# EAGLE board numpad.old (EAGLE 9.6.1)

Size 95 x 99 mm. Coordinates in mm from the lower left corner, seen from the top.
Outline: 0,0 95,0 95,99 0,99 0,0
Copper layers (1*16): Top 0.035mm / dielectric 1.5mm / Bottom 0.035mm
Design rules "default": minimum track width 6mil, minimum drill 0.35mm, track to track 6mil, track to pad 6mil, pad to pad 6mil, via to via 6mil, smd to smd 6mil, copper to edge 40mil, drill to drill 6mil, minimum pad ring 10mil, minimum via ring 8mil, stop-mask expansion 4mil, vias tented up to drill 0mil, thermal gap 10mil

## Footprints (pad centres in the part's own frame; a part is rotated, then mirrored left to right if it is on the bottom)
MX-1U = drill 1.3 pad 2.54: MX1 -3.81,2.54; MX2 2.54,5.08 | hole 4: 0,0 | hole 1.7: -5.08,0; 5.08,0
DIODE_HAND = smd 1.397 x 1.397: A1 -1.651,0; C1 1.651,0 | drill 1 pad 1.9: A2 -3.5,0 | smd 1.397 x 1.397 bottom: A3 -1.651,0; C3 1.651,0 | drill 1 pad 1.9 square: C2 3.5,0
SWITCH-SMD-SCHURTER-1241.1612.11 = smd 3 x 2: 1A -7,-3.75; 1B 7,-3.75; 2A -7,3.75; 2B 7,3.75
PROMICRO = drill 1 pad 2: 0 -7.62,11.43; 1 -7.62,13.97; 2 -7.62,3.81; 3 -7.62,1.27; 4 -7.62,-1.27; 5 -7.62,-3.81; 6 -7.62,-6.35; 7 -7.62,-8.89; 8 -7.62,-11.43; 9 -7.62,-13.97; 10 7.5,-13.97; 14 7.5,-8.89; 15 7.5,-6.35; 16 7.5,-11.43; 18 7.5,-3.81; 19 7.5,-1.27; 20 7.5,1.27; 21 7.5,3.81; GND@3 -7.62,8.89; GND@4 -7.62,6.35; GND@23 7.5,11.43; RAW 7.5,13.97; RST 7.5,8.89; VCC 7.5,6.35 | hole 2: -3.82,9.87; -4.318,-10.67; 4.318,-10.67
MX-2U-FLIPPED = drill 1.3 pad 2.54: MX1 -3.81,2.54; MX2 2.54,5.08 | hole 4: 0,0; -11.9,8.24; 11.9,8.24 | hole 1.7: -5.08,0; 5.08,0 | hole 3.05: -11.9,-7; 11.9,-7
MX-2U-ROTATED = drill 1.3 pad 2.54: MX1 -3.81,2.54; MX2 2.54,5.08 | hole 4: 0,0; -8.24,-11.9; -8.24,11.9 | hole 1.7: -5.08,0; 5.08,0 | hole 3.05: 7,-11.9; 7,11.9

## Placement (x,y rotation side)
BOTTOM1  KEYSWITCH-PLAIN-MX-1U  [MX-1U]  65.7,11.64 0 top
D1  [DIODE_HAND]  28,79 0 top
D2  [DIODE_HAND]  47,79 0 top
D3  [DIODE_HAND]  66,79 0 top
D4  [DIODE_HAND]  85,79 0 top
D5  [DIODE_HAND]  28,60 0 top
D6  [DIODE_HAND]  47,60 0 top
D7  [DIODE_HAND]  66,60 0 top
D8  [DIODE_HAND]  85,40 0 top
D9  [DIODE_HAND]  66,40 0 top
D10  [DIODE_HAND]  47,40 0 top
D11  [DIODE_HAND]  28,40 0 top
D12  [DIODE_HAND]  20,19 270 top
D13  [DIODE_HAND]  41,21 0 top
D14  [DIODE_HAND]  66,21 0 top
D15  [DIODE_HAND]  85,2 0 top
D16  [DIODE_HAND]  65,2 0 top
D17  [DIODE_HAND]  41,2 0 top
SW1  SWITCH-SMD-SCHURTER-1241.1612.11  [SWITCH-SMD-SCHURTER-1241.1612.11]  10,59 0 top
TOPLEFT  KEYSWITCH-PLAIN-MX-1U  [MX-1U]  27.63,87.8 0 top
TOPRIGHT  KEYSWITCH-PLAIN-MX-1U  [MX-1U]  84.78,87.84 0 top
U1  PROMICRO  [PROMICRO]  10.24,83.54 0 top
U$1  KEYSWITCH-PLAIN-MX-2U-FLIPPED  [MX-2U-FLIPPED]  37.17,11.64 0 top
U$2  KEYSWITCH-PLAIN-MX-2U-ROTATED  [MX-2U-ROTATED]  84.82,59.25 0 top
U$3  KEYSWITCH-PLAIN-MX-2U-ROTATED  [MX-2U-ROTATED]  84.78,21.16 0 top
U$20  KEYSWITCH-PLAIN-MX-1U  [MX-1U]  46.69,87.81 0 top
U$21  KEYSWITCH-PLAIN-MX-1U  [MX-1U]  65.74,87.81 0 top
U$23  KEYSWITCH-PLAIN-MX-1U  [MX-1U]  27.62,68.78 0 top
U$24  KEYSWITCH-PLAIN-MX-1U  [MX-1U]  46.69,68.76 0 top
U$25  KEYSWITCH-PLAIN-MX-1U  [MX-1U]  65.71,68.76 0 top
U$26  KEYSWITCH-PLAIN-MX-1U  [MX-1U]  65.7,49.76 0 top
U$27  KEYSWITCH-PLAIN-MX-1U  [MX-1U]  46.66,49.74 0 top
U$28  KEYSWITCH-PLAIN-MX-1U  [MX-1U]  27.62,49.7 0 top
U$29  KEYSWITCH-PLAIN-MX-1U  [MX-1U]  27.62,30.68 0 top
U$30  KEYSWITCH-PLAIN-MX-1U  [MX-1U]  46.66,30.66 0 top
U$31  KEYSWITCH-PLAIN-MX-1U  [MX-1U]  65.7,30.7 0 top

## Library data of the parts
BOTTOM1 TOPLEFT TOPRIGHT U$1-U$3 U$20 U$21 U$23-U$31 = Keyboard
D1-D17 = Components
SW1 = Hardware
U1 = MCU

## Nets
GND: SW1.2A SW1.2B U1.GND@3 U1.GND@4 U1.GND@23
N$1: SW1.1A SW1.1B U1.RST
N$2: D1.A1 D1.A2 D1.A3 TOPLEFT.MX1
N$3: D2.A1 D2.A2 D2.A3 U$20.MX1
N$4: D3.A1 D3.A2 D3.A3 U$21.MX1
N$5: D4.A1 D4.A2 D4.A3 TOPRIGHT.MX1
N$6: D1.C1 D1.C2 D1.C3 D2.C1 D2.C2 D2.C3 D3.C1 D3.C2 D3.C3 D4.C1 D4.C2 D4.C3 U1.9
N$7: TOPLEFT.MX2 U1.10 U$1.MX2 U$23.MX2 U$28.MX2 U$29.MX2
N$8: D5.A1 D5.A2 D5.A3 U$23.MX1
N$9: U1.16 U$20.MX2 U$24.MX2 U$27.MX2 U$30.MX2
N$10: D6.A1 D6.A2 D6.A3 U$24.MX1
N$11: D7.A1 D7.A2 D7.A3 U$25.MX1
N$12: D8.A1 D8.A2 D8.A3 U$2.MX1
N$13: D9.A1 D9.A2 D9.A3 U$26.MX1
N$14: D10.A1 D10.A2 D10.A3 U$27.MX1
N$15: D11.A1 D11.A2 D11.A3 U$28.MX1
N$16: D12.A1 D12.A2 D12.A3 U$29.MX1
N$17: D13.A1 D13.A2 D13.A3 U$30.MX1
N$18: D14.A1 D14.A2 D14.A3 U$31.MX1
N$19: BOTTOM1.MX1 D16.A1 D16.A2 D16.A3
N$20: D17.A1 D17.A2 D17.A3 U$1.MX1
N$21: D15.A1 D15.A2 D15.A3 U$3.MX1
N$22: D15.C1 D15.C2 D15.C3 D16.C1 D16.C2 D16.C3 D17.C1 D17.C2 D17.C3 U1.5
N$23: D12.C1 D12.C2 D12.C3 D13.C1 D13.C2 D13.C3 D14.C1 D14.C2 D14.C3 U1.6
N$24: D9.C1 D9.C2 D9.C3 D10.C1 D10.C2 D10.C3 D11.C1 D11.C2 D11.C3 U1.7
N$26: D5.C1 D5.C2 D5.C3 D6.C1 D6.C2 D6.C3 D7.C1 D7.C2 D7.C3 D8.C1 D8.C2 D8.C3 U1.8
N$27: BOTTOM1.MX2 U1.14 U$21.MX2 U$25.MX2 U$26.MX2 U$31.MX2
N$30: TOPRIGHT.MX2 U1.15 U$2.MX2 U$3.MX2